# Altium PCB Tractian_Challenge_v1.PcbDoc
Units mm, origin at the board's own origin, x right, y up, seen from the top; angles counter-clockwise.
Board outline 53.34 x 45.21 mm, 2 copper layers (Top Layer, Bottom Layer), stack 0.491 mm thick; 19 components, 11 nets, 92 pads, 80 vias.
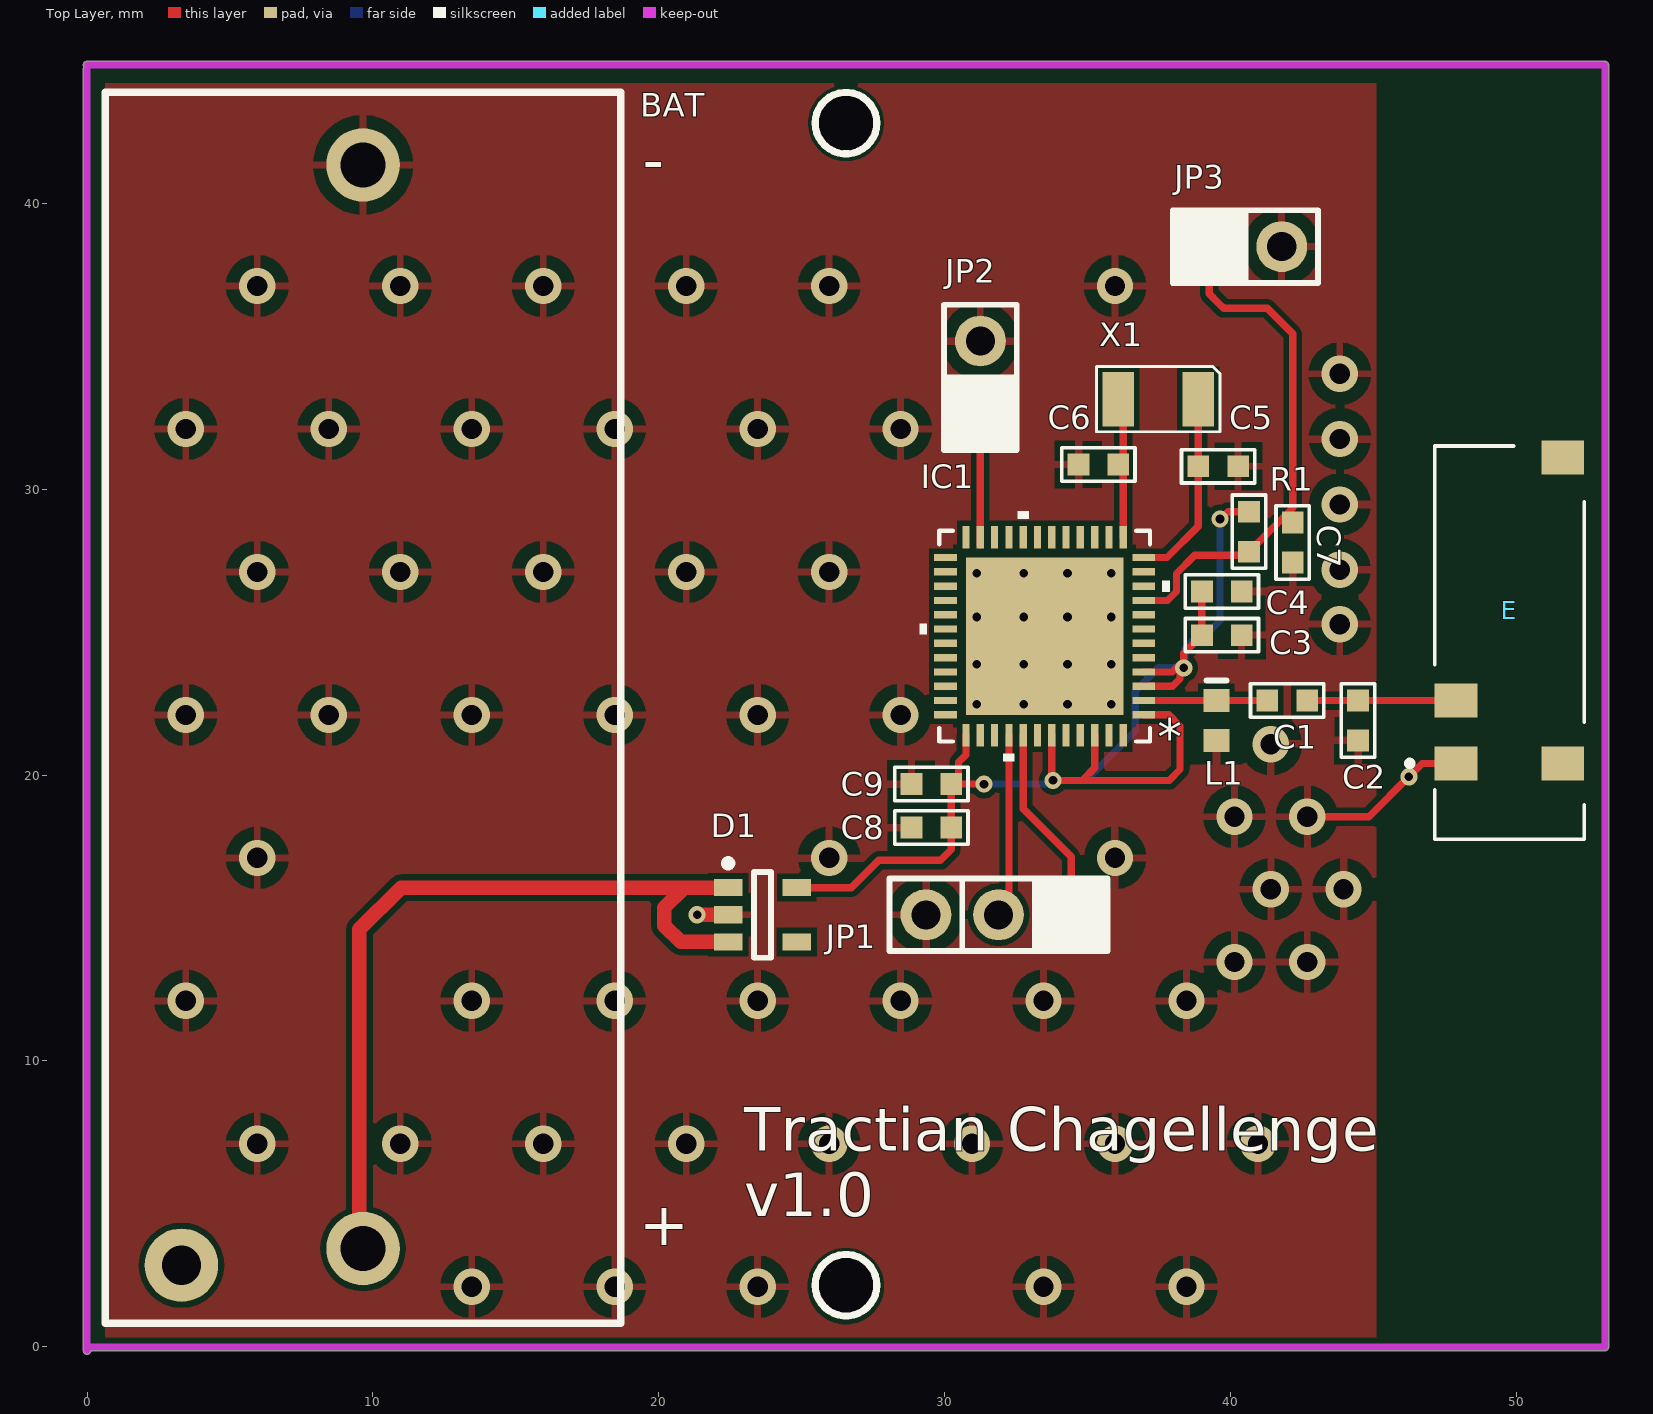
[diagram p0: Top Layer view]
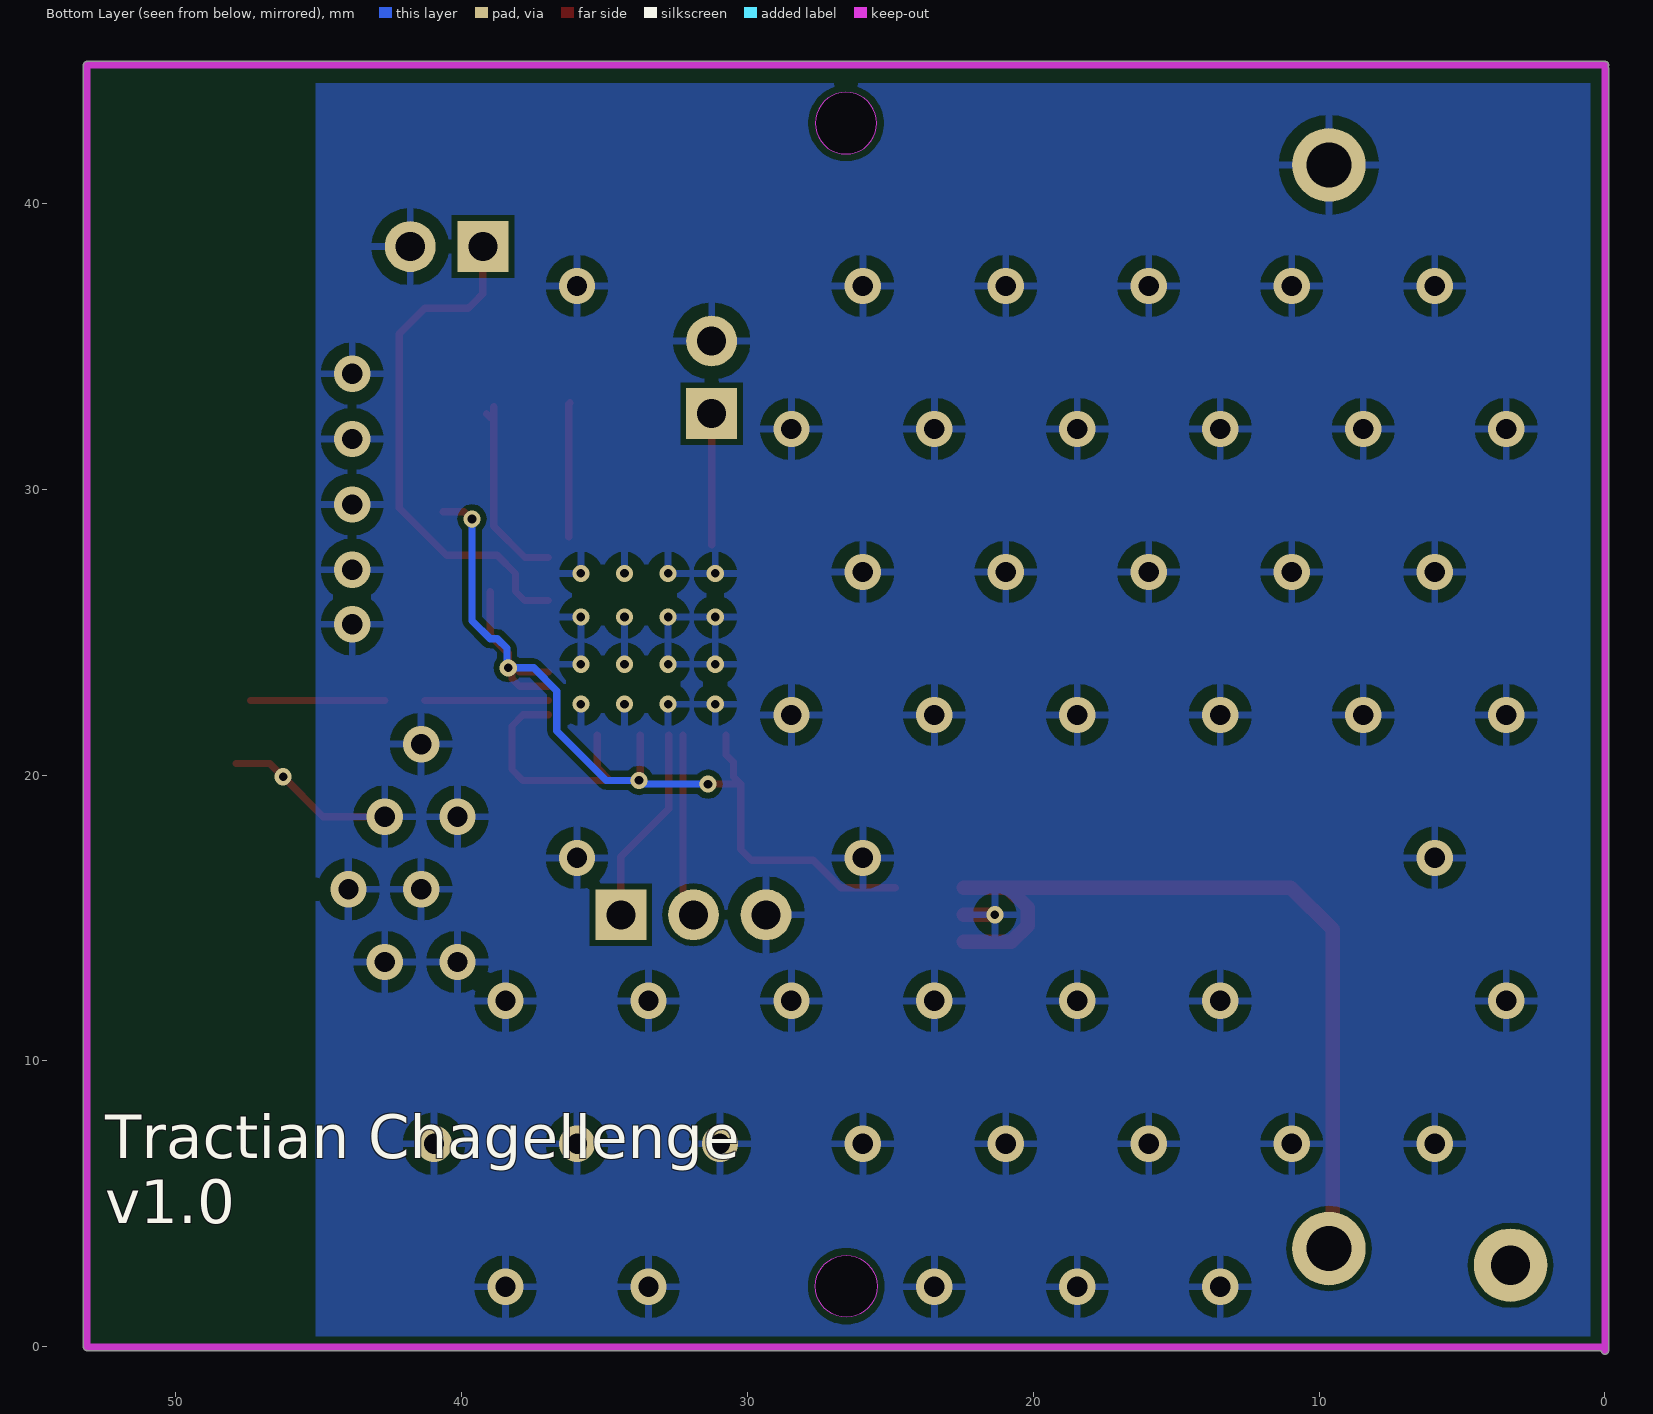
[diagram p1: Bottom Layer view, seen from below]

## Layer stack, top to bottom
Top Solder: solder mask 0.0102, Solder Resist, Dk 3.5
Top Layer: signal copper 0.0356
Dielectric 1: dielectric 0.42, FR-4, Dk 4.8
Bottom Layer: signal copper 0.0356
Bottom Solder: solder mask 0.0102, Solder Resist, Dk 3.5

## Board outline
-0.127,0.001 -0.127,33.147 -0.127,44.704 cw(c0,44.704) -0.11,44.768 cw(c0,44.831) 0,44.958 53.086,44.958 cw(c53.086,44.831) 53.213,44.831 53.213,0 cw(c53.086,0) 53.086,-0.127 0.127,-0.127 cw(c0,-0.127) -0.127,-0.127
cut-out: 26.543,41.721 cw(c26.543,42.799) 25.465,42.799 cw(c26.543,42.799) 26.543,43.877 cw(c26.543,42.799) 27.621,42.799 cw(c26.543,42.799)
cut-out: 25.458,2.123 ccw(c26.536,2.123) 26.536,1.045 ccw(c26.536,2.123) 27.614,2.123 ccw(c26.536,2.123) 26.536,3.2 ccw(c26.536,2.123)

## Design rules (kind name [scope] priority, off if disabled: settings)
Clearance [All] p1: gap=0.25 ignorepadtopadclearanceinfootprint=FALSE except(0: Arc-Hole Track-Hole SMDPad-Hole THPad-Hole Via-Hole Fill-Hole Poly-Hole Region-Hole Text-Hole; 0.15: Arc-Track Arc-SMDPad Track-Track Track-SMDPad SMDPad-SMDPad; 0.2: Arc-Poly Track-Poly SMDPad-Poly THPad-Poly Via-Poly Fill-Poly Poly-Poly)
FabricationTestpoint [(IsPad And (OnTopLayer Or OnBottomLayer)) Or (IsVia) Or (IsPad And OnMultiLayer)] p1: side=3 testpointundercomponent=FALSE minsize=1.016 maxsize=2.54 preferedsize=1.524 minholesize=0 maxholesize=1.016 preferedholesize=0.813 testpointgrid=0.025 allowsidetop=TRUE allowsidebottom=TRUE usegrid=FALSE gridtolerance=0
HoleSize [All] p1: absolutevalues=TRUE maxlimit=16 minlimit=0.025 maxpercent=80.000 minpercent=20.000
MinimumSolderMaskSliver [All] p1: minsoldermaskwidth=0.02
PlaneConnect A [InComponent('IC7')] p1: planeconnectstyle=Direct reliefexpansion=0.508 reliefentries=4 reliefconductorwidth=0.254 reliefairgap=0.254
PlaneConnect [All] p2: planeconnectstyle=Relief reliefexpansion=0.508 reliefentries=4 reliefconductorwidth=0.254 reliefairgap=0.254
PlaneConnect "Power Plane" [InNet('+3V3')] p3: planeconnectstyle=Direct reliefexpansion=0.508 reliefentries=4 reliefconductorwidth=0.254 reliefairgap=0.254
PolygonConnect [All] p1: connectstyle=Relief reliefconductorwidth=0.254 reliefentries=4 polygonreliefangle="90 Angle" airgapwidth=0.454
RoutingLayers RoutingLayers_1 [All] p2: top layer_v5=TRUE bottom layer_v5=TRUE
RoutingVias [All] p1: holewidth=0.711 width=0.6 viastyle="Through Hole" minholewidth=0.3 minwidth=0.3 maxholewidth=0.3 maxwidth=1.27
SilkToSilkClearance [All] p1: silktosilkclearance=0.005
SilkToSolderMaskClearance [IsPad] p1 off: minsilkscreentomaskgap=0.001 clearancetoexposedcopper=TRUE
SolderMaskExpansion [All] p1: expansion=0.102 istentingtop=FALSE
Width [All] p1: maxlimit=2 minlimit=0.1 preferedwidth=0.3
24 further rules are at their usual default settings.

## Components (designator, comment, footprint, x,y, rotation, side; value= is the part's Value field where it differs from the comment)
BAT "BH123A" BH123A 6.477,22.098 r270 top (schematic designator BAT?)
C1 "4.7pF" 0603C-GENERIC 42.672,22.606 r180 top
C2 "2.7pF" 0603C-GENERIC 44.45,21.209 r90 top
C3 "100nF" 0603C-GENERIC 40.386,24.892 r180 top
C4 "10uF" 0603C-GENERIC 40.386,26.416 r180 top
C5 "12pF" 0603C-GENERIC 40.259,30.796 r180 top
C6 "12pF" 0603C-GENERIC 34.671,30.861 r0 top
C7 "0.1uF" 0603C-GENERIC 42.164,28.829 r270 top
C8 "10uF" 0603C-GENERIC 28.829,18.161 r0 top
C9 "100nF" 0603C-GENERIC 28.829,19.685 r0 top
D1 "MAX40200" SOT23-MAX40200 23.622,15.113 r0 top
E "PRO-OB-440" ANT_PRO-OB-440 47.879,20.406 r90 top
IC1 "ESP32-PICO-D4" ESP32-PICO-D4_EXP 33.49,24.856 r180 top
JP1 "HEADER-1X3" HEADER-1X3 34.417,15.113 r270 top
JP2 "HEADER-1X2" HEADER-1X2 31.242,32.639 r180 top
JP3 "HEADER-1X2" HEADER-1X2 39.243,38.481 r90 top
L1 "Inductor" INDC1608L 39.497,21.906 r270 top value=120nH
R1 "0603R-000" 0603R-GENERIC 40.64,29.21 r270 top
X1 "Crystal_32k" Crystal_32K_9pF 37.465,33.147 r180 top

## Footprints (in the part's own frame and the unit in brackets; to place one, negate y for a bottom-side part, rotate by r counter-clockwise, add the part's x,y. Pads: shape width x height; smd on the part's side, far side on the other; paste and mask are expansions set on the pad)
0603C-GENERIC [mil] "CAPACITOR 0603"
  rect 30x30 smd: 1(0,0) 2(55,0)
  silkscreen extent -23,-23 78,23, body extent -4,-15 59,15, height 19
0603R-GENERIC [mil] "RESISTOR 0603"
  rect 30x30 smd: 1(0,0) 2(55,0)
  silkscreen extent -23,-23 78,23, body extent -4,-15 59,15, height 19
ANT_PRO-OB-440 [mm]
  rect 1.2x1.5 smd: 1(0,0) 2(2.2,0) 3(0,-3.73) 4(10.7,-3.73)
  silkscreen extent -2.65,-4.48 11.1,1.72, body extent -2.56,-4.52 11.19,0.71, height 3.4
BH123A [mm]
  round 2.57 hole 1.57: 1(-19.241,3.175) 2(18.66,3.175)
  round 2.57 hole 1.37: 3(19.241,-3.175)
  silkscreen extent -21.78,-5.84 21.27,12.19, body extent -21.78,-5.71 21.15,12.07, height 12.19
Crystal_32K_9pF [mm]
  rect 1.1x1.9 smd: 1(-1.4,0) 4(1.4,0)
  silkscreen extent -2.16,-1.14 2.16,1.14, body extent -1.6,-0.76 1.6,0.74, height 0.89
ESP32-PICO-D4_EXP [mil]
  rect 31x10 smd paste+0 mask+0: 1(-136.5,108.27) 2(-136.5,88.58) 3(-136.5,68.9) 4(-136.5,49.21) 5(-136.5,29.53) 6(-136.5,9.84) 7(-136.5,-9.84) 8(-136.5,-29.53) 9(-136.5,-49.21) 10(-136.5,-68.9) 11(-136.5,-88.58) 12(-136.5,-108.27) 25(136.5,-108.27) 26(136.5,-88.58) 27(136.5,-68.9) 28(136.5,-49.21) 29(136.5,-29.53) 30(136.5,-9.84) 31(136.5,9.84) 32(136.5,29.53) 33(136.5,49.21) 34(136.5,68.9) 35(136.5,88.58) 36(136.5,108.27)
  rect 10x31 smd paste+0 mask+0: 13(-108.27,-136.5) 14(-88.58,-136.5) 15(-68.9,-136.5) 16(-49.21,-136.5) 17(-29.53,-136.5) 18(-9.84,-136.5) 19(9.84,-136.5) 20(29.53,-136.5) 21(49.21,-136.5) 22(68.9,-136.5) 23(88.58,-136.5) 24(108.27,-136.5) 37(108.27,136.5) 38(88.58,136.5) 39(68.9,136.5) 40(49.21,136.5) 41(29.53,136.5) 42(9.84,136.5) 43(-9.84,136.5) 44(-29.53,136.5) 45(-49.21,136.5) 46(-68.9,136.5) 47(-88.58,136.5) 48(-108.27,136.5)
  rect 217x217 smd paste-108 mask+0: 49(0,0)
  silkscreen extent -172,-172 172,172, body extent -140,-140 140,140, height 41
HEADER-1X2 [mil]
  rect 70x70 hole 40: 1(0,0)
  round 70 hole 40: 2(0,-100)
  silkscreen extent -50,-150 50,50, body extent -50,-150 50,50, height 470
HEADER-1X3 [mil]
  rect 70x70 hole 40: 1(0,0)
  round 70 hole 40: 2(0,-100) 3(0,-200)
  silkscreen extent -50,-250 50,50, body extent -50,-250 50,50, height 470
INDC1608L [mm] "Chip Inductor, Body 1.6x0.8mm, IPC High Density"
  rect 0.8x0.9 smd: 1(-0.7,0) 2(0.7,0)
  silkscreen extent -1.4,-0.35 -1.4,0.35, body extent -0.87,-0.48 0.87,0.48, height 0.55
SOT23-MAX40200 [mm] "SOT23, 5-Leads, Body 2,90x2,45mm, Pitch 0,95mm, IPC Medium Density"
  rect 1x0.6 smd: 1(-1.2,0.95) 2(-1.2,0) 3(-1.2,-0.95) 4(1.2,-0.95) 5(1.2,0.95)
  silkscreen extent -1.32,-1.5 0.3,1.92, body extent -1.3,-1.5 1.3,1.5, height 1.1

## Part data
BAT: "Suporte de Bateria CR123A", Manufacturer Part Number=BH123A
C1 C2 C3 C4 C8 C9: library part 0603C-33PF-50V-C0G-PAN, "CAPACITOR 0603 CERAMIC", Manufacturer Part Number=CL10C0R5BB8ANNC, IDNEOC=CCA0124, Reel=C42
C5 C6: library part 0603C-000, "CAPACITOR 0603 CERAMIC", Manufacturer Part Number=251R14S8R2CV4T, IDNEOC=CCA0095, TYPE="NPO OR COG"
C7: library part 0603C-000, "CAPACITOR 0603 CERAMIC"
D1: "Ultra-Tiny Micropower, 1A Ideal Diode with Ultra-Low Voltage Drop", IDNEOC=CDI0103, Manufacturer Part Number=MAX40200
E: "2.4GHz Bluetooth, WirelessHART, WLAN, Zigbeeâ„¢ Stamped Metal RF Antenna 2.4GHz ~ 2.5GHz Solder Surface Mount", Package=None, Digi-Key_Part_Number=1532-1001-1-ND, Digi-Key_Purchase_URL=https://www.digikey.com/product-detail/en/proant-ab/PRO-OB-440/1532-1001-1-ND/4895684?utm_source=snapeda&utm_medium=aggregator&utm_campaign=symbol, MF="Proant AB", MP=PRO-OB-440, SnapEDA_Link=https://www.snapeda.com/parts/PRO-OB-440/Proant%20AB/view-part/2307534/?ref=snap
IC1: "No Description Available", Mfr_Name="Espressif Systems", Copyright="Copyright (C) 2022 Ultra Librarian. All rights reserved.", Manufacturer_Part_Number=ESP32-PICO-D4, RefDes=RefDes, TYPE=DEV
JP1 JP2: Manufacturer Part Number=., Supplier Part Number 1=S1011E-36-ND, IDNEOC=., Supplier 1=Digi-Key
  JP2: Reel=TH
JP3: Supplier Part Number 1=S1011E-36-ND, Reel=TH, Supplier 1=Digi-Key
L1: "FIXED IND 120NH 300MA 650 MOHM", Manufacturer Part Number=PE-0603CDR12JTT, Code_IEC=1005, Code_JEITA=0402, IDNEOC=CIN0023, LatestRevisionDate=29-May-2009, LatestRevisionNote="IPC-7351 Footprint Added.", PackageDescription="Chip Inductor", PackageReference=0402-A, Published=8-Jun-2000, Publisher="Altium Limited"
R1: "GENERIC RESISTOR 0603"
X1: Manufacturer Part Number=ABS07-32.768KHZ-7-T

## Via types
v1: diameter 1.27, hole 0.711, Top Layer to Bottom Layer, tented both sides, 58 vias
v2: diameter 0.6, hole 0.3, Top Layer to Bottom Layer, 21 vias
v3: diameter 0.6/0.6 (per signal layer), hole 0.3, Top Layer to Bottom Layer, 1 vias

## Nets (pads, with @x,y where several pads share a name; then routed paths per layer and width w, separated by ;. In a path a pad name is that pad's centre, name@x,y a point inside that pad or via, vN(x,y) a via of type N, cw(c..) or ccw(c..) an arc to the next point about the centre after c; other vN are vias at no path point)
BOOT: IC1.23 JP2.1 | length 4.6
  Top Layer w0.254: IC1.23@31.242,28.048 JP2.1
EN_ESP32: C7.1 IC1.9 JP3.1 R1.2 | length 18.2
  Top Layer w0.254: IC1.9 37.79,26.106 38.1,26.416 38.1,27.051 38.735,27.686 40.513,27.686 41.91,29.083 42.164,29.337 42.164,33.02 42.164,35.433 41.275,36.322 39.751,36.322 39.56,36.513 39.243,36.83 JP3.1
GND: BAT.1 C2.1 C3.1 C4.1 C5.1 C6.1 C7.2 C8.1 C9.1 D1.2 E.1 IC1.49 JP1.3 JP2.2 JP3.2 L1.2 | length 7.1
  Top Layer w0.254: v1(42.672,18.542) 44.831,18.542 v2(46.228,19.939) 46.695,20.406 E.1
  Top Layer w0.508: v2(21.336,15.113) D1.2
  other v1: 13.452,2.102 18.452,2.102 23.452,2.102 33.452,2.102 38.452,2.102 5.952,7.102 10.952,7.102 15.952,7.102 20.952,7.102 25.952,7.102 30.952,7.102 35.952,7.102 40.952,7.102 3.452,12.102 13.452,12.102 18.452,12.102 23.452,12.102 28.452,12.102 33.452,12.102 38.452,12.102 40.132,13.462 42.672,13.462 41.402,16.002 43.942,16.002 5.952,17.102 25.952,17.102 35.952,17.102 40.132,18.542 41.402,21.082 3.452,22.102 8.452,22.102 13.452,22.102 18.452,22.102 23.452,22.102 28.452,22.102 43.815,25.273 5.952,27.102 10.952,27.102 15.952,27.102 20.952,27.102 25.952,27.102 43.815,27.178 43.815,29.464 43.815,31.75 3.452,32.102 8.452,32.102 13.452,32.102 18.452,32.102 23.452,32.102 28.452,32.102 43.815,34.036 5.952,37.102 10.952,37.102 15.952,37.102 20.952,37.102 25.952,37.102 35.952,37.102
  other v2: 31.115,22.479 32.766,22.479 34.29,22.479 35.814,22.479 31.115,23.876 32.766,23.876 34.29,23.876 35.814,23.876 31.115,25.527 32.766,25.527 34.29,25.527 35.814,25.527 31.115,27.051 32.766,27.051 34.29,27.051
  other v3: 35.814,27.051
NetBAT?_2: BAT.2 D1.1 D1.3 | length 28.8
  Top Layer w0.508: BAT.2 9.525,3.566 9.525,14.605 10.983,16.063 20.889,16.063 ; D1.3 20.762,14.163 20.193,14.732 20.193,15.367 20.889,16.063 ; D1.1 20.889,16.063
NetC1_1: C1.1 C2.2 E.2 | length 4.7
  Top Layer w0.254: C1.1 C2.2 E.2@47.371,22.606
NetC1_2: C1.2 IC1.2 L1.1 | length 4.3
  Top Layer w0.254: IC1.2 L1.1 C1.2
NetC5_2: C5.2 IC1.12 X1.1 | length 6.7
  Top Layer w0.254: IC1.12 37.766,27.606 38.862,28.702 C5.2 38.862,32.509 X1.1@38.862,32.89 ; X1.1@38.989,32.509 X1.1@39.119,32.639
NetC6_2: C6.2 IC1.13 X1.4 | length 4.7
  Top Layer w0.254: X1.4@36.192,33.02 36.24,32.972 36.24,30.861 IC1.13
RXD: IC1.40 JP1.2 | length 6.4
  Top Layer w0.254: JP1.2 31.877,15.525 32.24,15.888 IC1.40
TXD: IC1.41 JP1.1 | length 7
  Top Layer w0.254: IC1.41 32.74,18.822 34.417,17.145 JP1.1
VDDA: C3.2 C4.2 C8.2 C9.2 D1.5 IC1.1 IC1.3 IC1.4 IC1.37 IC1.43 IC1.46 R1.1 | length 44.5
  Top Layer w0.254: D1.5 26.731,16.063 27.686,17.018 29.845,17.018 30.226,17.399 C8.2 C9.2 ; IC1.37 30.74,20.707 30.48,20.447 30.48,19.939 C9.2 ; v2(31.369,19.685) C9.2 ; IC1.43 33.74,19.854 v2(33.782,19.812) 34.798,19.812 ; IC1.46 35.24,20.254 34.798,19.812 ; IC1.1 37.838,22.106 38.227,21.717 38.227,20.193 37.846,19.812 34.798,19.812 ; IC1.3 37.965,23.106 38.227,23.368 v2@38.227,23.749 ; IC1.4 37.957,23.606 v2@38.227,23.876 ; v2@38.354,24.003 38.354,24.257 C3.2 C4.2 ; v2(39.624,28.956) 39.646,28.956 39.9,29.21 R1.1
  Bottom Layer w0.254: v2(31.369,19.685) 33.655,19.685 v2(33.782,19.812) 34.925,19.812 36.655,21.542 36.655,22.939 37.465,23.749 v2(38.354,23.749) 38.4,23.795 38.4,24.43 38.735,24.765 38.989,24.765 39.624,25.4 v2(39.624,28.956)
pads on no net: BAT.3 D1.4 E.3 E.4 IC1.5 IC1.6 IC1.7 IC1.8 IC1.10 IC1.11 IC1.14 IC1.15 IC1.16 IC1.17 IC1.18 IC1.19 IC1.20 IC1.21 IC1.22 IC1.24 IC1.25 IC1.26 IC1.27 IC1.28 IC1.29 IC1.30 IC1.31 IC1.32 IC1.33 IC1.34 IC1.35 IC1.36 IC1.38 IC1.39 IC1.42 IC1.44 IC1.45 IC1.47 IC1.48

## Polygon pours and split planes (outlines as drawn)
GND on Top Layer "GND_L01_P000" (solid, pour order 0): 45.085,0 0.635,0 0.635,44.196 45.085,44.196
GND on Bottom Layer "GND_L02_P001" (solid, pour order 1): 45.085,0.381 0.508,0.381 0.508,44.196 45.085,44.196

## Keep-outs
Keep-Out Layer:
  lines w0.254: 0,-0.127 0,33.147 0,44.704 ; 0,0 53.086,0 53.086,44.831 0,44.831

## Silkscreen, mask and mechanical layers (free items; w line width, h text height)
Top Overlay:
  circle w0.254: c26.543,42.799 r1.078
  circle w0.254: c26.543,2.159 r1.078
  text "-" at 19.431,40.767 h1.52
  text "Tractian Chagellenge / v1.0" at 22.987,4.572 h1.52
  text "+" at 19.304,3.556 h1.52
Bottom Overlay:
  text "Tractian Chagellenge / v1.0" at 52.451,4.318 h1.52

## Text inside footprints (layer, text, board x,y; h text height)
IC1: Top Overlay "*" at 38.303,22.491 h1.27 r180; Mechanical 13 "*" at 36.881,22.491 h1.27 r180